# EAGLE board FX I2C MCU v1.0 (EAGLE 6.4)
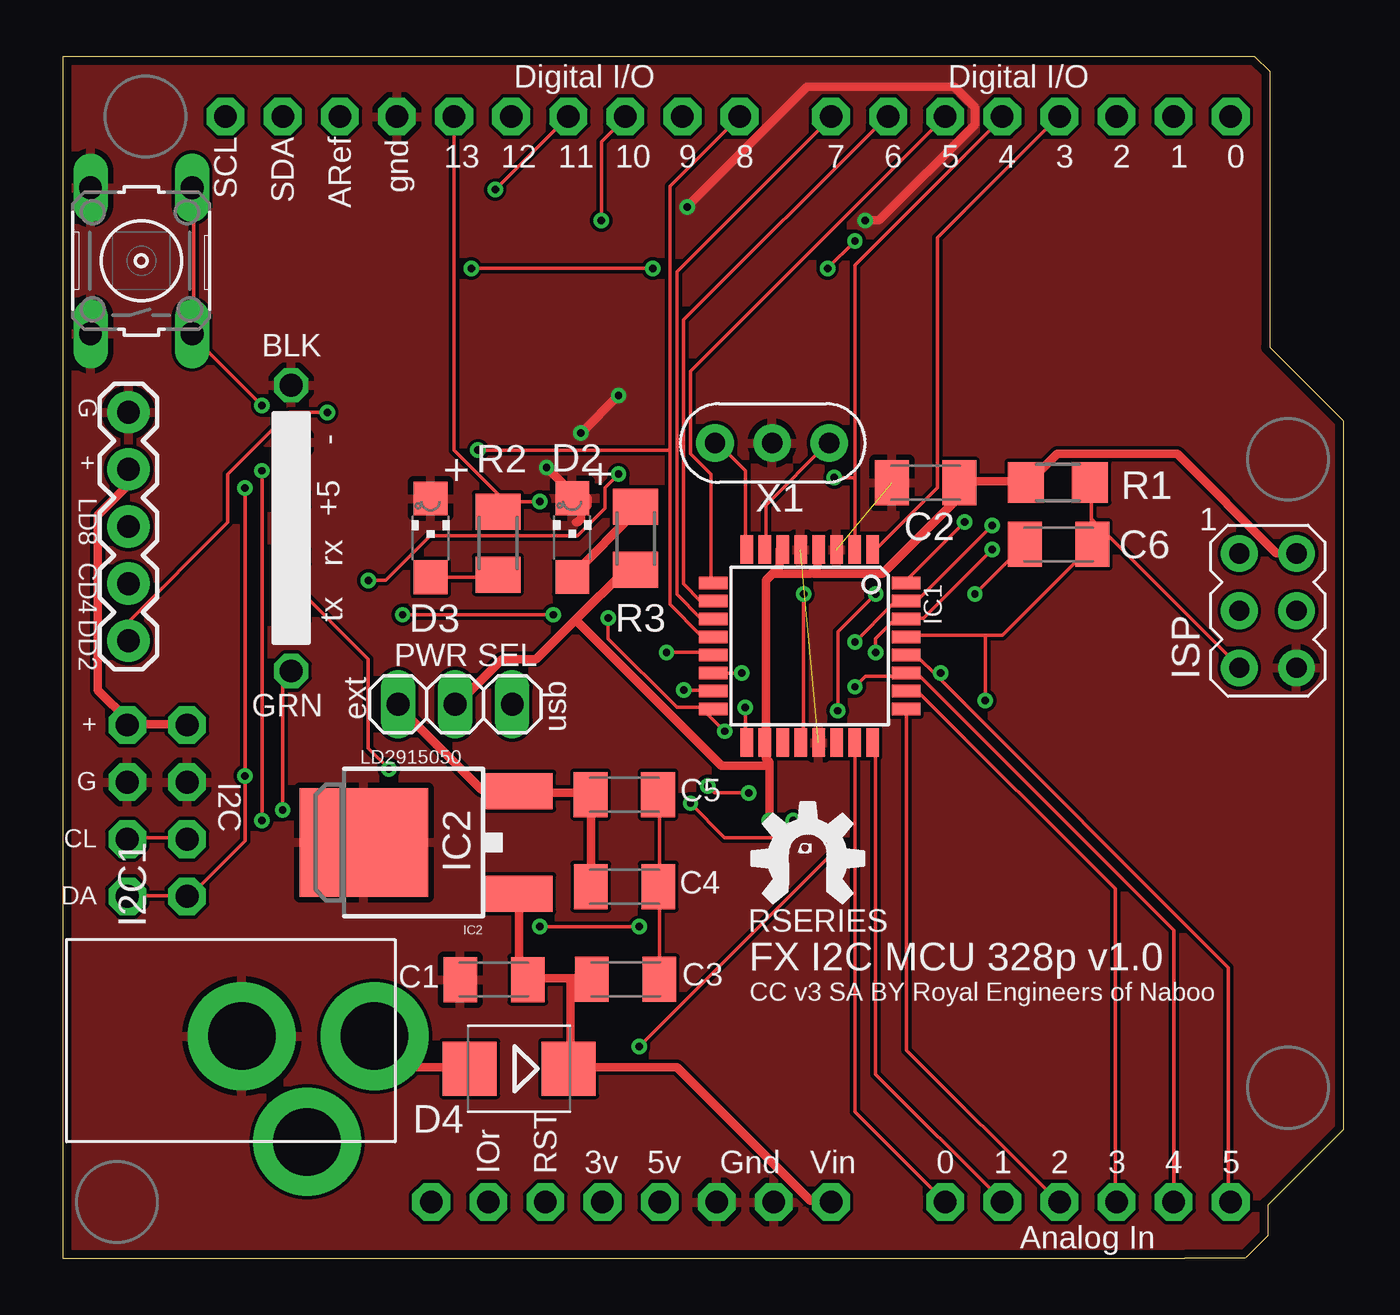
[diagram p0: board, top side]
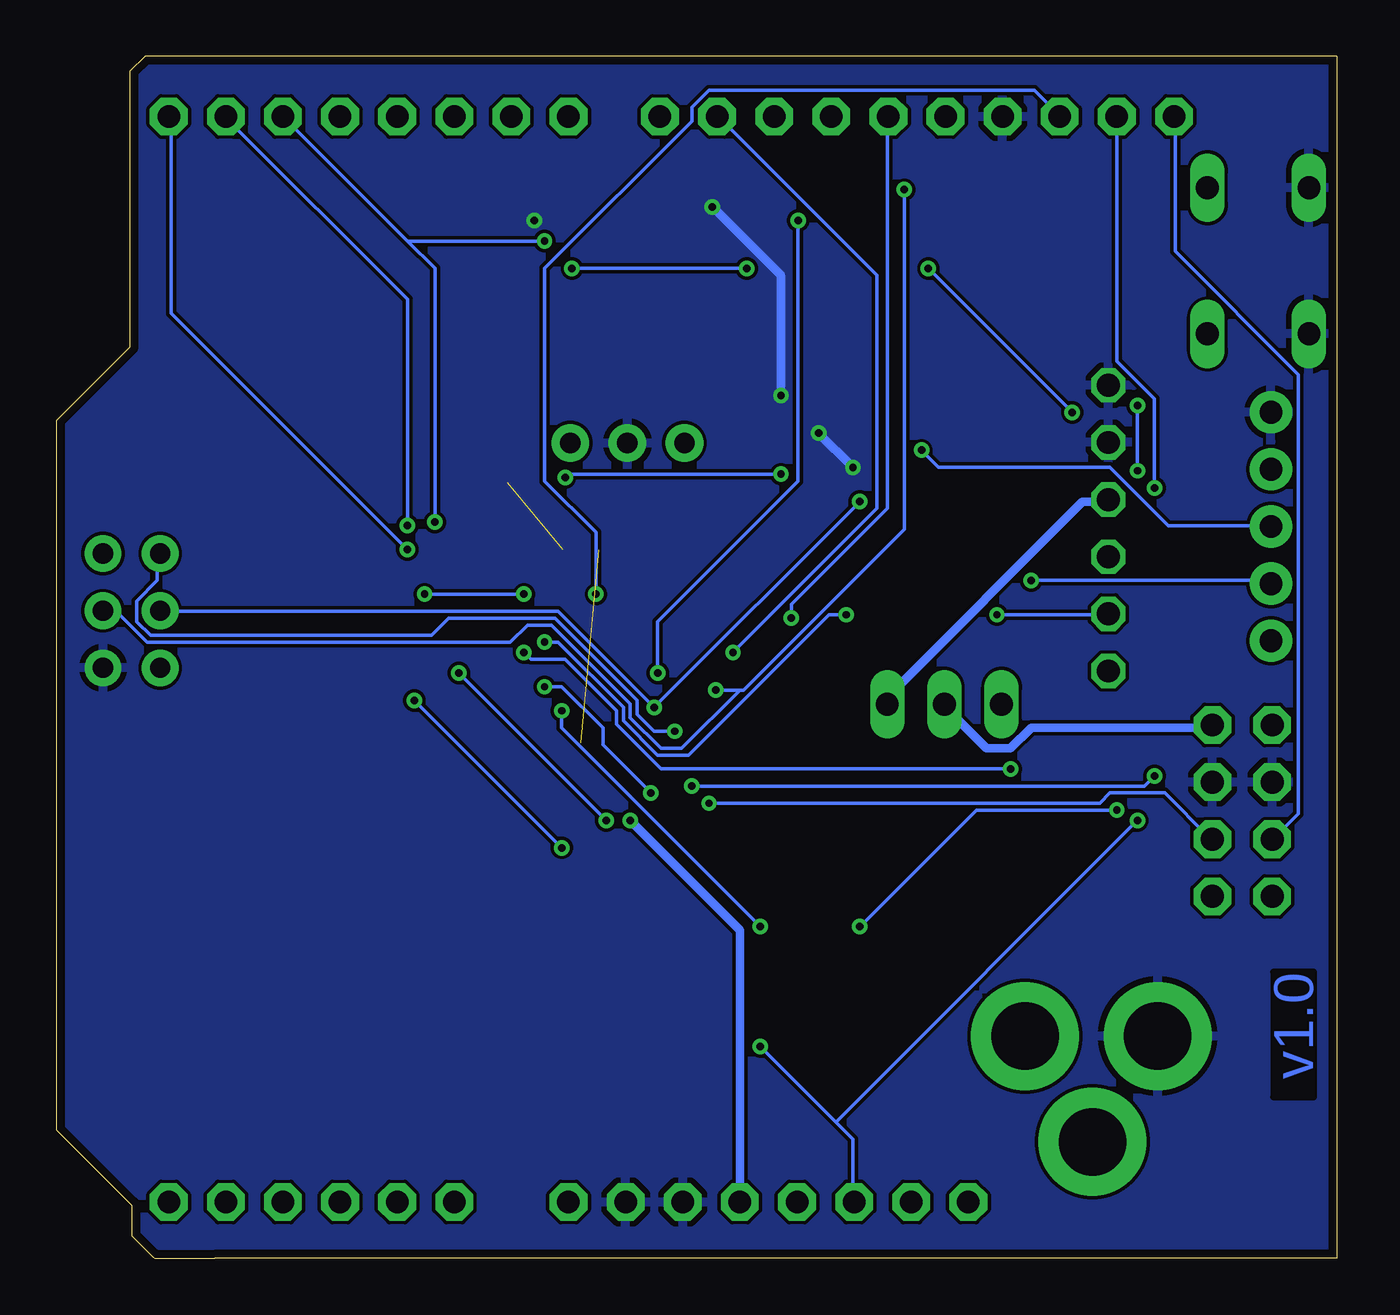
[diagram p1: board, bottom side, seen from below]

Size 56.94 x 53.44 mm. Coordinates in mm from the lower left corner, seen from the top.
Outline: 49.89,0 0,0 0,53.44 52.96,53.44
Outline: 52.95,53.44 52.99,53.44 53.66,52.77 53.66,40.51 56.94,37.24 56.94,5.73 53.58,2.36 53.58,1 52.62,0.05 52.57,0 49.89,0
Copper layers (1*16): Top 0.0356mm / dielectric 1.5011mm / Bottom 0.0356mm
Design rules "LaenPCBOrder": minimum track width 6mil, minimum drill 13mil, track to track 6mil, track to pad 6mil, pad to pad 6mil, via to via 12mil, smd to smd 6mil, copper to edge 15mil, drill to drill 6mil, minimum pad ring 7mil, minimum via ring 7mil, stop-mask expansion 4mil, vias tented up to drill 0mil, thermal gap 10mil
Net classes: 1 supply: width 0.381 mm, drill 0.152 mm, clearance 0.152 mm

## Footprints (pad centres in the part's own frame; a part is rotated, then mirrored left to right if it is on the bottom)
C1206K = smd 1.5 x 2: 1 -1.5,0; 2 1.5,0
CHIPLED_1206 = smd 1.5 x 1.5: A 0,-1.75; C 0,1.75
SMB = smd 2.4 x 2.4: A 2.2,0; C -2.2,0
1X04-CB = drill 1.016 pad 1.676 octagon: 1 -3.81,0; 2 -1.27,0; 3 1.27,0; 4 3.81,0
TQFP32-08 = smd 1.27 x 0.559: 1 -4.293,2.8; 2 -4.293,2; 3 -4.293,1.2; 4 -4.293,0.4; 5 -4.293,-0.4; 6 -4.293,-1.2; 7 -4.293,-2; 8 -4.293,-2.8; 17 4.293,-2.8; 18 4.293,-2; 19 4.293,-1.2; 20 4.293,-0.4; 21 4.293,0.4; 22 4.293,1.2; 23 4.293,2; 24 4.293,2.8 | smd 0.559 x 1.27: 9 -2.8,-4.293; 10 -2,-4.293; 11 -1.2,-4.293; 12 -0.4,-4.293; 13 0.4,-4.293; 14 1.2,-4.293; 15 2,-4.293; 16 2.8,-4.293; 25 2.8,4.293; 26 2,4.293; 27 1.2,4.293; 28 0.4,4.293; 29 -0.4,4.293; 30 -1.2,4.293; 31 -2,4.293; 32 -2.8,4.293
DPAK = smd 1.6 x 3: 1 -2.28,-5.31; 3 2.28,-5.31 | smd 4.826 x 5.715: 4 0,1.588
AVRISP = drill 0.9 pad 1.626: 1 -1.27,2.54; 2 1.27,2.54; 3 -1.27,0; 4 1.27,0; 5 -1.27,-2.54; 6 1.27,-2.54
PJ-102A = drill 3 pad 4.8: RING 0.1,-3.39; RING_SW -4.6,-6.29; TIP 0.1,-9.29
1X06-CLEAN = drill 1.016 octagon: 1 -6.35,0; 2 -3.81,0; 3 -1.27,0; 4 1.27,0; 5 3.81,0; 6 6.35,0
1X03 = drill 1.016 long: 1 -2.54,0; 2 0,0; 3 2.54,0
R1206 = smd 1.6 x 1.803: 1 -1.422,0; 2 1.422,0
M1206 = smd 1.6 x 2: 1 -1.4,0; 2 1.4,0
B3F-10XX = drill 1.016 long: 1 -3.251,2.261; 2 3.251,2.261; 3 -3.251,-2.261; 4 3.251,-2.261
1X05 = drill 1.016 pad 1.88: 1 0,0; 2 2.54,0; 3 5.08,0; 4 7.62,0; 5 10.16,0
ARDUINOR3-PINSONLY = drill 1 pad 1.676 octagon: 3V 36.83,3.81; 5V 39.37,3.81; A0 52.07,3.81; A1 54.61,3.81; A2 57.15,3.81; A3 59.69,3.81; A4 62.23,3.81; A5 64.77,3.81; AREF 25.146,52.07; D0 64.77,52.07; D1 62.23,52.07; D2 59.69,52.07; D3 57.15,52.07; D4 54.61,52.07; D5 52.07,52.07; D6 49.53,52.07; D7 46.99,52.07; D8 42.926,52.07; D9 40.386,52.07; D10 37.846,52.07; D11 35.306,52.07; D12 32.766,52.07; D13 30.226,52.07; GND 27.686,52.07; GND1 44.45,3.81; GND2 41.91,3.81; IOREF 31.75,3.81; RESERVED 29.21,3.81; RESET 34.29,3.81; SCL 20.066,52.07; SDA 22.606,52.07; VIN 46.99,3.81
CERM_OSC = drill 0.9 pad 1.676: P$1 -2.54,0; P$2 0,0; P$3 2.54,0

## Placement (x,y rotation side)
C1  0.1uF  [C1206K]  19.17,12.4 180 top
C2  0.1uF  [C1206K]  38.37,34.48 180 top
C3  10uf 25V  [C1206K]  25.03,12.41 0 top
C4  10uf 25V  [C1206K]  24.98,16.52 0 top
C5  0.1uF  [C1206K]  24.96,20.61 0 top
C6  0.1uF  [C1206K]  44.28,31.74 0 top
D2  [CHIPLED_1206]  22.65,32.04 0 top
D3  Green  [CHIPLED_1206]  16.35,32.03 0 top
D4  [SMB]  20.29,8.43 180 top
I2C  [1X04-CB]  2.87,19.9 90 top
I2C1  [1X04-CB]  5.52,19.9 90 top
IC1  MEGA48/88/168-AU  [TQFP32-08]  33.21,27.22 270 top
IC2  LM2931_FIXED  [DPAK]  14.97,18.49 90 top
ISP  AVRISP-6  [AVRISP]  53.59,28.79 0 top
J2  2.1MMJACK  [PJ-102A]  4.57,9.78 90 top
JP7  [1X06-CLEAN]  10.16,32.46 270 top
PWR_SEL  [1X03]  17.44,24.64 0 top
R1  10K  [R1206]  44.25,34.49 0 top
R2  1.0 K  [M1206]  19.35,31.8 270 top
R3  1.0 K  [M1206]  25.47,32 90 top
S1  RESET  [B3F-10XX]  3.49,44.35 90 top
TEECES  [1X05]  2.92,27.46 90 top
U1  ARDUINOR3PINSONLY  [ARDUINOR3-PINSONLY]  -12.83,-1.31 0 top
U$2  RSERIES-OSHW-LOGOMEDIUM  [RSERIES-OSHW-LOGO-MEDIUM]  33.02,17.83 0 top
X1  16.00MHz  [CERM_OSC]  31.54,36.25 180 top

## Library data of the parts
C1 C2 C5 C6 D2 D3 J2 R2 R3 = minimidi
C3 C4 = rcl
D4 = diode
I2C I2C1 JP7 = carduino
IC1 = avr-7
IC2 = SparkFun-PowerIC
ISP = adafruit
PWR_SEL = pinhead
R1 = rcl-ez
S1 = switch-omron
TEECES = SparkFun-Connectors
U1 U$2 = rseries
X1 = digg

## Nets
+5V [supply]: C2.1 I2C1.4 I2C.4 IC1.4 IC1.6 IC1.18 ISP.2 PWR_SEL.2 R1.1 R3.1 TEECES.4 U1.5V
+9V [supply]: C1.1 C3.1 D4.C IC2.1 U1.VIN
ANALOG0: IC1.23 U1.A0
ANALOG1: IC1.24 U1.A1
ANALOG2: IC1.25 U1.A2
ANALOG3: IC1.26 U1.A3
ANALOG4: I2C1.1 I2C.1 IC1.27 U1.A4 U1.SDA
ANALOG5: I2C1.2 I2C.2 IC1.28 U1.A5 U1.SCL
AREF: IC1.20 U1.AREF
DIGITAL2: IC1.32 TEECES.1 U1.D2
DIGITAL3: IC1.1 U1.D3
DIGITAL4: IC1.2 TEECES.2 U1.D4
DIGITAL5: IC1.9 U1.D5
DIGITAL6: IC1.10 U1.D6
DIGITAL7: IC1.11 U1.D7
DIGITAL8: IC1.12 TEECES.3 U1.D8
DIGITAL9: IC1.13 U1.D9
DIGITAL10: IC1.14 U1.D10
GND [supply]: C1.2 C2.2 D2.C D3.C I2C1.3 I2C.3 IC1.3 IC1.5 IC1.21 IC2.4 ISP.6 J2.RING JP7.1 JP7.2 S1.1 S1.2 TEECES.5 U1.GND U1.GND1 U1.GND2 X1.P$2
MISO: IC1.16 ISP.1 U1.D12
MOSI: IC1.15 ISP.4 U1.D11
N$1: IC1.7 X1.P$1
N$2: IC1.8 X1.P$3
N$3 [supply]: D2.A R3.2
N$4: D3.A R2.2
N$5: U1.RESERVED
N$6 [supply]: D4.A J2.TIP
N$7: U1.IOREF
N$8: C3.2 C4.2 C5.2
N$9 [supply]: C4.1 C5.1 IC2.3 PWR_SEL.1
N$11: U1.3V
RST: C6.2 IC1.29 ISP.5 R1.2 S1.3 S1.4 U1.RESET
RTS#: C6.1 JP7.6
RXD: IC1.30 JP7.4 U1.D0
SCK: IC1.17 ISP.3 R2.1 U1.D13
TXD: IC1.31 JP7.5 U1.D1
USB_5V [supply]: JP7.3 PWR_SEL.3

## Tracks (layer width: path | path; a pad name or v marks a point on that pad's centre or on a via)
+5V  (via drill 0.33)
  Top 0.381: I2C1.4 5.51,23.74 2.92,23.74 I2C.4 2.92,23.89 1.54,25.26 1.54,33.03 2.92,34.4 2.92,35.01 TEECES.4 | 22.8,28.38 21.05,26.63 19.53,26.63 17.55,24.65 PWR_SEL.2 | 22.8,28.38 25.01,30.59 R3.1 | 31.64,30.52 31.87,30.75 31.87,31.51 IC1.6 | 31.64,30.52 31.26,30.14 31.26,22.97 IC1.18 31.26,22.82 31.26,22.21 31.41,22.06 31.41,21.91 | 33.32,30.52 33.24,30.44 31.72,30.44 31.64,30.52 | 33.32,30.52 33.55,30.75 33.55,31.51 IC1.4 | 33.32,30.52 33.4,30.44 36.44,30.44 39.8,33.8 39.8,34.4 C2.1 39.95,34.56 42.69,34.56 R1.1 43,34.56 44.22,35.78 49.55,35.78 53.97,31.36 54.73,31.36 ISP.2 | 31.41,21.91 v31.41,19.47 | 22.8,28.38 22.88,28.31 29.28,21.91 31.26,21.91 31.41,21.91
  Bottom 0.381: v31.41,19.47 26.54,14.59 26.54,2.55 U1.5V | I2C1.4 5.66,23.58 13.58,23.58 14.5,22.67 15.56,22.67 17.39,24.5 PWR_SEL.2
+9V
  Top 0.381: 22.58,12.46 23.49,12.46 C3.1 | 22.58,12.46 20.75,12.46 C1.1 20.75,12.61 20.29,13.07 20.29,16.12 IC2.1 | 22.58,12.46 22.58,12.31 22.58,8.5 D4.C 22.73,8.5 27.3,8.5 33.24,2.55 34.16,2.55 U1.VIN
ANALOG0
  Top 0.152: IC1.23 35.23,22.82 35.23,6.51 39.19,2.55 U1.A0
ANALOG1
  Top 0.152: IC1.24 36.14,22.82 36.14,8.19 41.78,2.55 U1.A1
ANALOG2
  Top 0.152: IC1.25 37.51,24.35 37.51,9.26 44.22,2.55 U1.A2
ANALOG3
  Top 0.152: IC1.26 37.51,25.11 38.12,25.11 46.81,16.42 46.81,2.55 U1.A3
ANALOG4  (via drill 0.33)
  Top 0.152: U1.A4 49.4,2.55 49.4,14.59 38.12,25.87 37.51,25.87 IC1.27 37.36,25.87 35.68,25.87 v35.23,25.41 | I2C.1 2.92,16.12 5.51,16.12 I2C1.1 5.66,16.12 8.1,18.55 v8.1,21.45 v8.1,34.25 | v30.5,20.69 28.98,20.69 v28.67,20.99
  Bottom 0.152: v8.1,34.25 8.1,38.21 9.77,39.89 9.77,50.71 U1.SDA | v35.23,25.41 34.46,25.41 32.63,23.58 32.63,22.82 v30.5,20.69 | v28.67,20.99 8.55,20.99 v8.1,21.45
ANALOG5  (via drill 0.33)
  Top 0.152: 38.88,25.87 51.84,12.92 51.84,2.55 U1.A5 | 38.88,25.87 37.97,26.78 37.51,26.78 IC1.28 | I2C.2 2.92,18.71 5.51,18.71 I2C1.2 | v39.04,26.02 38.88,25.87 | v32.48,19.47 31.72,18.71 29.43,18.71 v27.91,20.23
  Bottom 0.152: U1.SCL 7.18,50.71 7.18,44.77 1.7,39.28 1.7,19.77 2.76,18.71 I2C.2 | v32.48,19.47 v39.04,26.02 | v27.91,20.23 10.54,20.23 10.08,20.69 7.64,20.69 5.66,18.71 I2C1.2
AREF  (via drill 0.33)
  Top 0.152: v32.94,29.53 32.94,22.97 IC1.20
  Bottom 0.152: v32.94,29.53 32.94,32.27 35.23,34.56 35.23,44.01 28.67,50.56 28.67,51.17 27.91,51.93 13.43,51.93 12.37,50.86 U1.AREF
DIGITAL2  (via drill 0.33)
  Top 0.152: v40.1,32.73 37.51,30.14 IC1.32 | v11.76,37.61 10.08,37.61 7.34,34.86 7.34,32.73 2.92,28.31 2.92,27.55 TEECES.1 | v26.23,44.01 v18.16,44.01 | v35.23,45.23 v34.01,44.01
  Bottom 0.152: v40.1,32.73 40.1,44.01 41.32,45.23 | 41.32,45.23 46.81,50.71 U1.D2 | v18.16,44.01 v11.76,37.61 | v34.01,44.01 v26.23,44.01 | 41.32,45.23 v35.23,45.23
DIGITAL3
  Top 0.152: IC1.1 36.14,31.51 38.88,34.25 38.88,45.38 44.22,50.71 U1.D3
DIGITAL4  (via drill 0.33)
  Top 0.152: 35.23,34.71 35.23,44.16 41.78,50.71 U1.D4 | 35.23,34.71 35.23,31.51 IC1.2 | v13.58,30.14 14.35,30.14 16.33,32.12 22.88,32.12 24.1,33.34 24.1,34.25 v24.71,34.86 | 35.23,34.71 v34.31,34.71
  Bottom 0.152: v13.58,30.14 2.92,30.14 TEECES.2 | v24.71,34.86 34.16,34.86 v34.31,34.71
DIGITAL5
  Top 0.152: IC1.9 28.82,30.14 28.82,34.86 27.91,35.78 27.91,39.43 39.19,50.71 U1.D5
DIGITAL6
  Top 0.152: IC1.10 28.82,29.22 28.37,29.22 27.6,29.98 27.6,41.72 36.6,50.71 U1.D6
DIGITAL7
  Top 0.152: IC1.11 28.82,28.46 28.37,28.46 27.3,29.53 27.3,43.85 34.16,50.71 U1.D7
DIGITAL8  (via drill 0.33)
  Top 0.152: 26.99,35.93 26.99,47.66 30.04,50.71 U1.D8 | 26.99,35.93 26.99,29.07 28.37,27.7 28.82,27.7 IC1.12 | 26.99,35.93 v18.46,35.93
  Bottom 0.152: v18.46,35.93 17.7,35.17 10.08,35.17 7.49,32.58 2.92,32.58 TEECES.3
DIGITAL9  (via drill 0.33)
  Top 0.152: v26.84,26.94 28.82,26.94 IC1.13
  Bottom 0.152: v26.84,26.94 20.44,33.34 20.44,43.7 27.45,50.71 U1.D9
DIGITAL10  (via drill 0.33)
  Top 0.152: v30.2,26.02 28.98,26.02 IC1.14 | v23.95,46.14 23.95,49.64 25.01,50.71 U1.D10
  Bottom 0.152: v30.2,26.02 30.2,28.31 23.95,34.56 v23.95,46.14
GND  (via drill 0.33)  (2 unrouted)
  Top 0.381: v35.68,46.14 36.29,46.14 40.56,50.41 40.56,51.17 39.64,52.08 33.09,52.08 v27.76,46.75 | v23.03,36.69 v24.71,38.37 | v21.51,35.17 22.73,33.95 23.18,33.95 23.34,33.8 23.34,33.49 23.03,33.19 23.03,32.88 22.88,32.73 22.82,32.73 | D2.C 22.73,33.8 22.73,33.62
  Bottom 0.381: v27.76,46.75 24.71,43.7 v24.71,38.37 | v21.51,35.17 v23.03,36.69
  pour Top: 0.12,53.56 56.89,53.56 56.89,-0.04 0.12,-0.04
  pour Bottom: 0.12,53.56 56.89,53.56 56.89,-0.04 0.12,-0.04
MISO  (via drill 0.33)
  Top 0.152: 28.37,24.5 27.3,24.5 24.25,27.55 v24.25,28.46 | 28.37,24.5 28.82,24.5 IC1.16 28.37,24.5 | 28.37,24.5 v29.43,23.43
  Bottom 0.152: v24.25,28.46 24.25,29.07 19.98,33.34 19.98,50.71 U1.D12 | v29.43,23.43 30.35,23.43 31.11,24.19 31.11,24.8 34.77,28.46 39.49,28.46 40.25,27.7 52.75,27.7 53.36,28.31 53.36,29.22 52.45,30.14 52.45,31.2 ISP.1
MOSI  (via drill 0.33)
  Top 0.152: v27.6,25.26 28.82,25.26 IC1.15 | v19.22,47.51 22.42,50.71 U1.D11
  Bottom 0.152: 26.54,25.26 26.39,25.26 19.22,32.42 v19.22,47.51 | 26.54,25.26 v27.6,25.26 | 26.54,25.26 29.13,22.67 30.04,22.67 31.41,24.04 31.41,24.65 34.92,28.16 35.99,28.16 36.75,27.39 52.9,27.39 54.27,28.77 54.73,28.77 ISP.4
N$1
  Top 0.152: IC1.7 31.26,31.51 31.26,33.49 34.01,36.23 X1.P$1
N$2
  Top 0.152: IC1.8 30.35,31.51 30.35,35.01 29.13,36.23 X1.P$3
N$3
  Top 0.381: D2.A 22.73,30.44 25.47,33.19 25.47,33.34 R3.2
N$4
  Top 0.152: D3.A 16.48,30.29 19.22,30.29 R2.2
N$6
  Top 0.381: D4.A 18,8.5 15.26,8.5 13.89,9.87 J2.TIP
N$8
  Top 0.152: C3.2 26.54,12.46 26.54,16.42 C4.2 26.54,16.57 26.54,20.54 C5.2
N$9
  Top 0.381: C4.1 23.49,16.57 23.49,20.54 C5.1 23.34,20.69 20.29,20.69 IC2.3 20.14,20.84 18.61,20.84 14.96,24.5 PWR_SEL.1
RST  (via drill 0.33)
  Top 0.152: S1.4 5.81,47.51 5.81,41.11 S1.3 5.81,40.96 v8.86,37.91 | 41.02,27.7 41.78,27.7 45.74,31.66 C6.2 45.74,31.81 45.74,32.88 | 41.02,27.7 37.51,27.7 IC1.29 | 45.74,32.88 45.74,34.4 R1.2 | 45.74,32.88 52.29,26.33 ISP.5 | v34.46,18.25 v25.62,9.41 | 41.02,27.7 v41.02,24.8 | v8.86,19.47 v8.86,35.01
  Bottom 0.152: v25.62,9.41 22.27,6.06 | 22.27,6.06 21.51,5.3 21.51,2.55 U1.RESET | v41.02,24.8 v34.46,18.25 | v8.86,35.01 v8.86,37.91 | 22.27,6.06 v8.86,19.47
RTS#  (via drill 0.33)
  Top 0.152: v40.56,29.53 42.69,31.66 C6.1 | v36.14,29.53 34.46,27.85 v34.46,24.35 | v21.2,14.74 v25.62,14.74 | v9.77,19.93 9.77,25.72 10.08,26.02 JP7.6
  Bottom 0.152: v36.14,29.53 v40.56,29.53 | v34.46,24.35 34.46,23.58 v25.62,14.74 | v9.77,19.93 16.02,19.93 v21.2,14.74
RXD  (via drill 0.33)
  Top 0.152: v41.32,31.51 38.27,28.46 37.51,28.46 IC1.30 37.36,28.31 36.9,28.31 36.14,27.55 v36.14,26.94 | v14.5,21.75 13.58,22.67 13.58,26.63 10.23,29.98 10.23,31.05 JP7.4
  Bottom 0.152: v41.32,31.51 51.84,42.02 51.84,50.71 U1.D0 | v14.5,21.75 30.04,21.75 32.02,23.74 32.02,24.35 34.31,26.63 35.83,26.63 v36.14,26.94
SCK  (via drill 0.33)
  Top 0.152: v30.35,24.5 30.35,22.97 IC1.17 | 19.68,33.64 v21.2,33.64 | 19.68,33.64 19.38,33.34 R2.1 19.68,33.64 | 19.68,33.64 17.39,35.93 17.39,50.71 U1.D13
  Bottom 0.152: v21.2,33.64 v30.35,24.5 34.62,28.77 52.29,28.77 ISP.3
TXD  (via drill 0.33)
  Top 0.152: v41.32,32.58 37.97,29.22 37.51,29.22 IC1.31 37.36,29.07 36.9,29.07 v35.23,27.39 | v21.81,28.61 v15.11,28.61
  Bottom 0.152: v41.32,32.58 41.32,42.63 49.4,50.71 U1.D1 | v15.11,28.61 10.23,28.61 JP7.5 | v21.81,28.61 22.58,28.61 28.82,22.36 30.2,22.36 31.72,23.89 31.72,24.5 34.62,27.39 v35.23,27.39
USB_5V
  Bottom 0.381: PWR_SEL.3 19.98,24.96 11.3,33.64 10.23,33.64 JP7.3

## Text on the board
Bottom: v1.0
tPlace: BLK | - | R2 | D2 | +5 | + | X1 | + | rx | tx | D3 | R3 | ext | PWR SEL | GRN | usb | IC2
_tsilk: G | + | LD8 | R1 | C2 | CD4 | C6 | DD2 | + | G | LD2915050 | CL | DA | RSERIES | FX I2C MCU 328p v1.0 | CC v3 SA BY Royal Engineers of Naboo